# Altium PCB Elevate_sch_bak.PcbDoc
Units mm, origin at the board's own origin, x right, y up, seen from the top; angles counter-clockwise.
Board outline 70 x 70 mm, 4 copper layers (Top Layer, Internal Plane 1, Internal Plane 2, Bottom Layer), stack 0.462 mm thick; 64 components, 58 nets, 258 pads, 50 vias.
Unrouted connection lines stored in the file: 23.
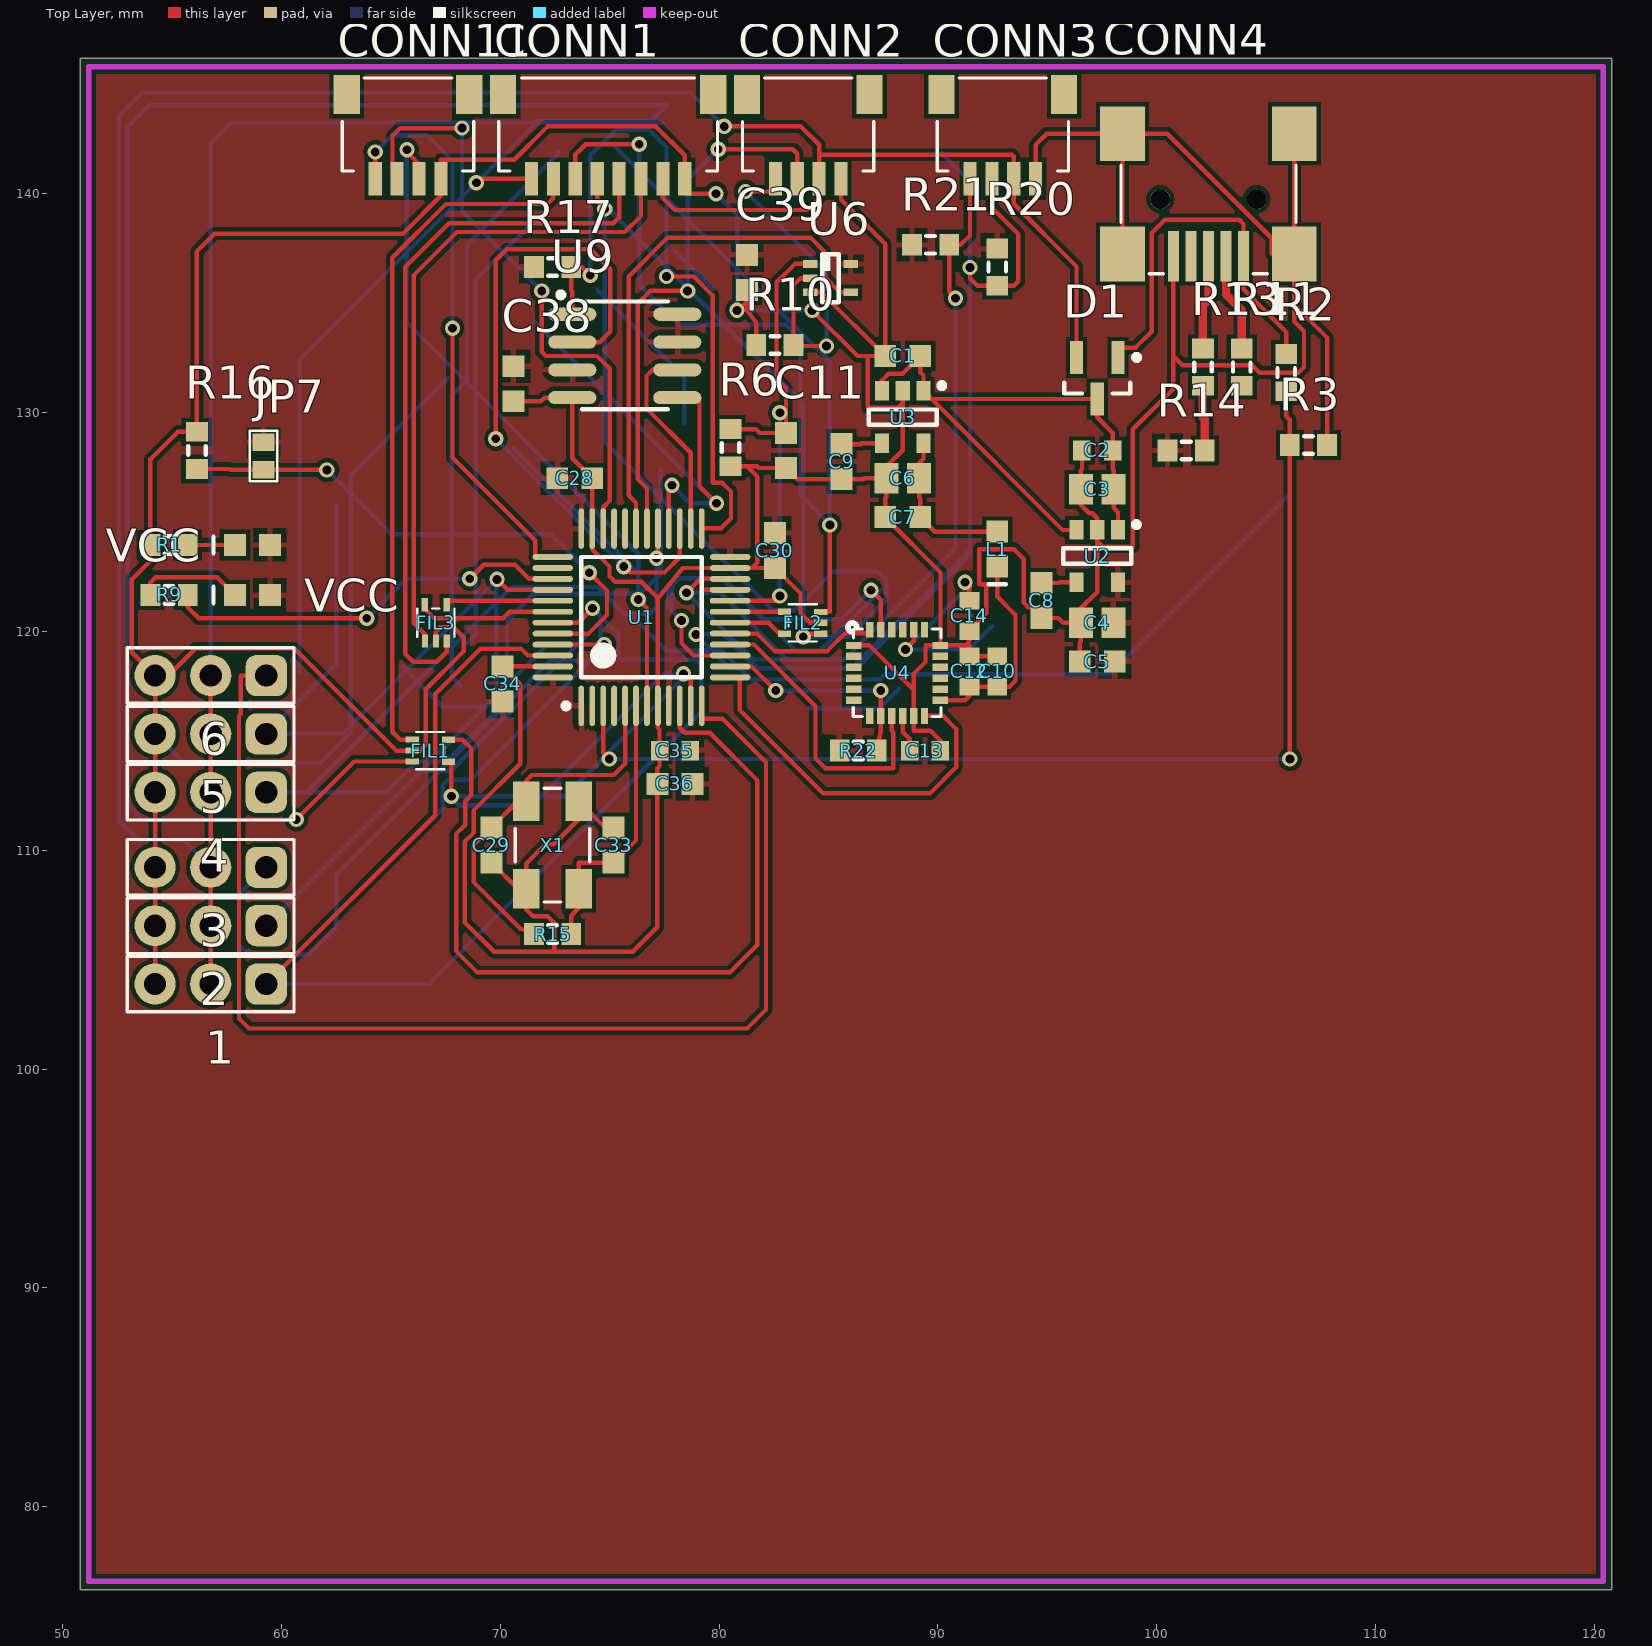
[diagram p0: Top Layer view]
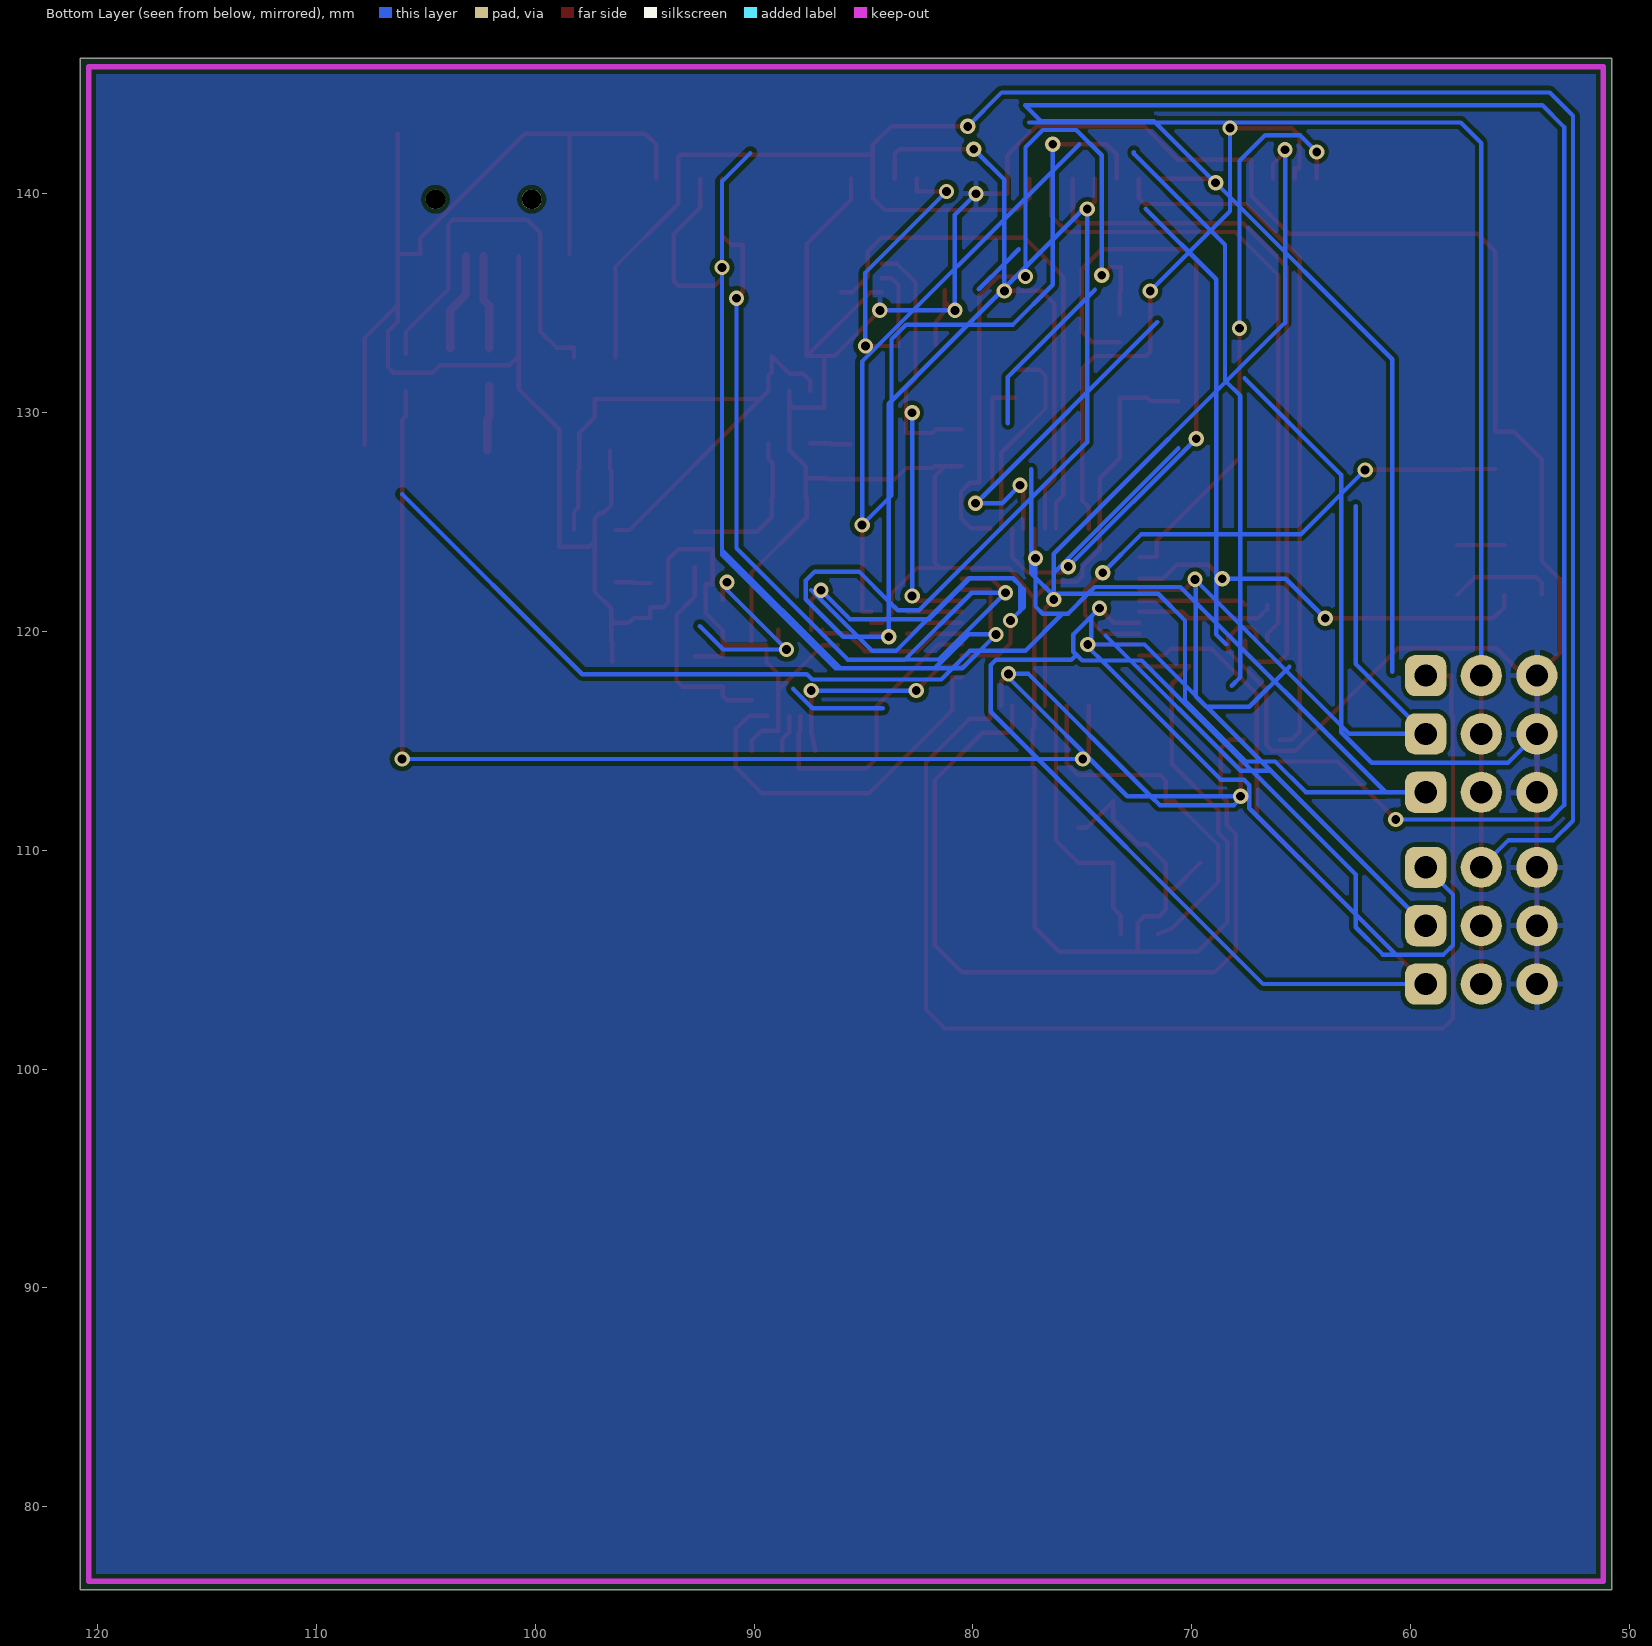
[diagram p1: Bottom Layer view, seen from below]
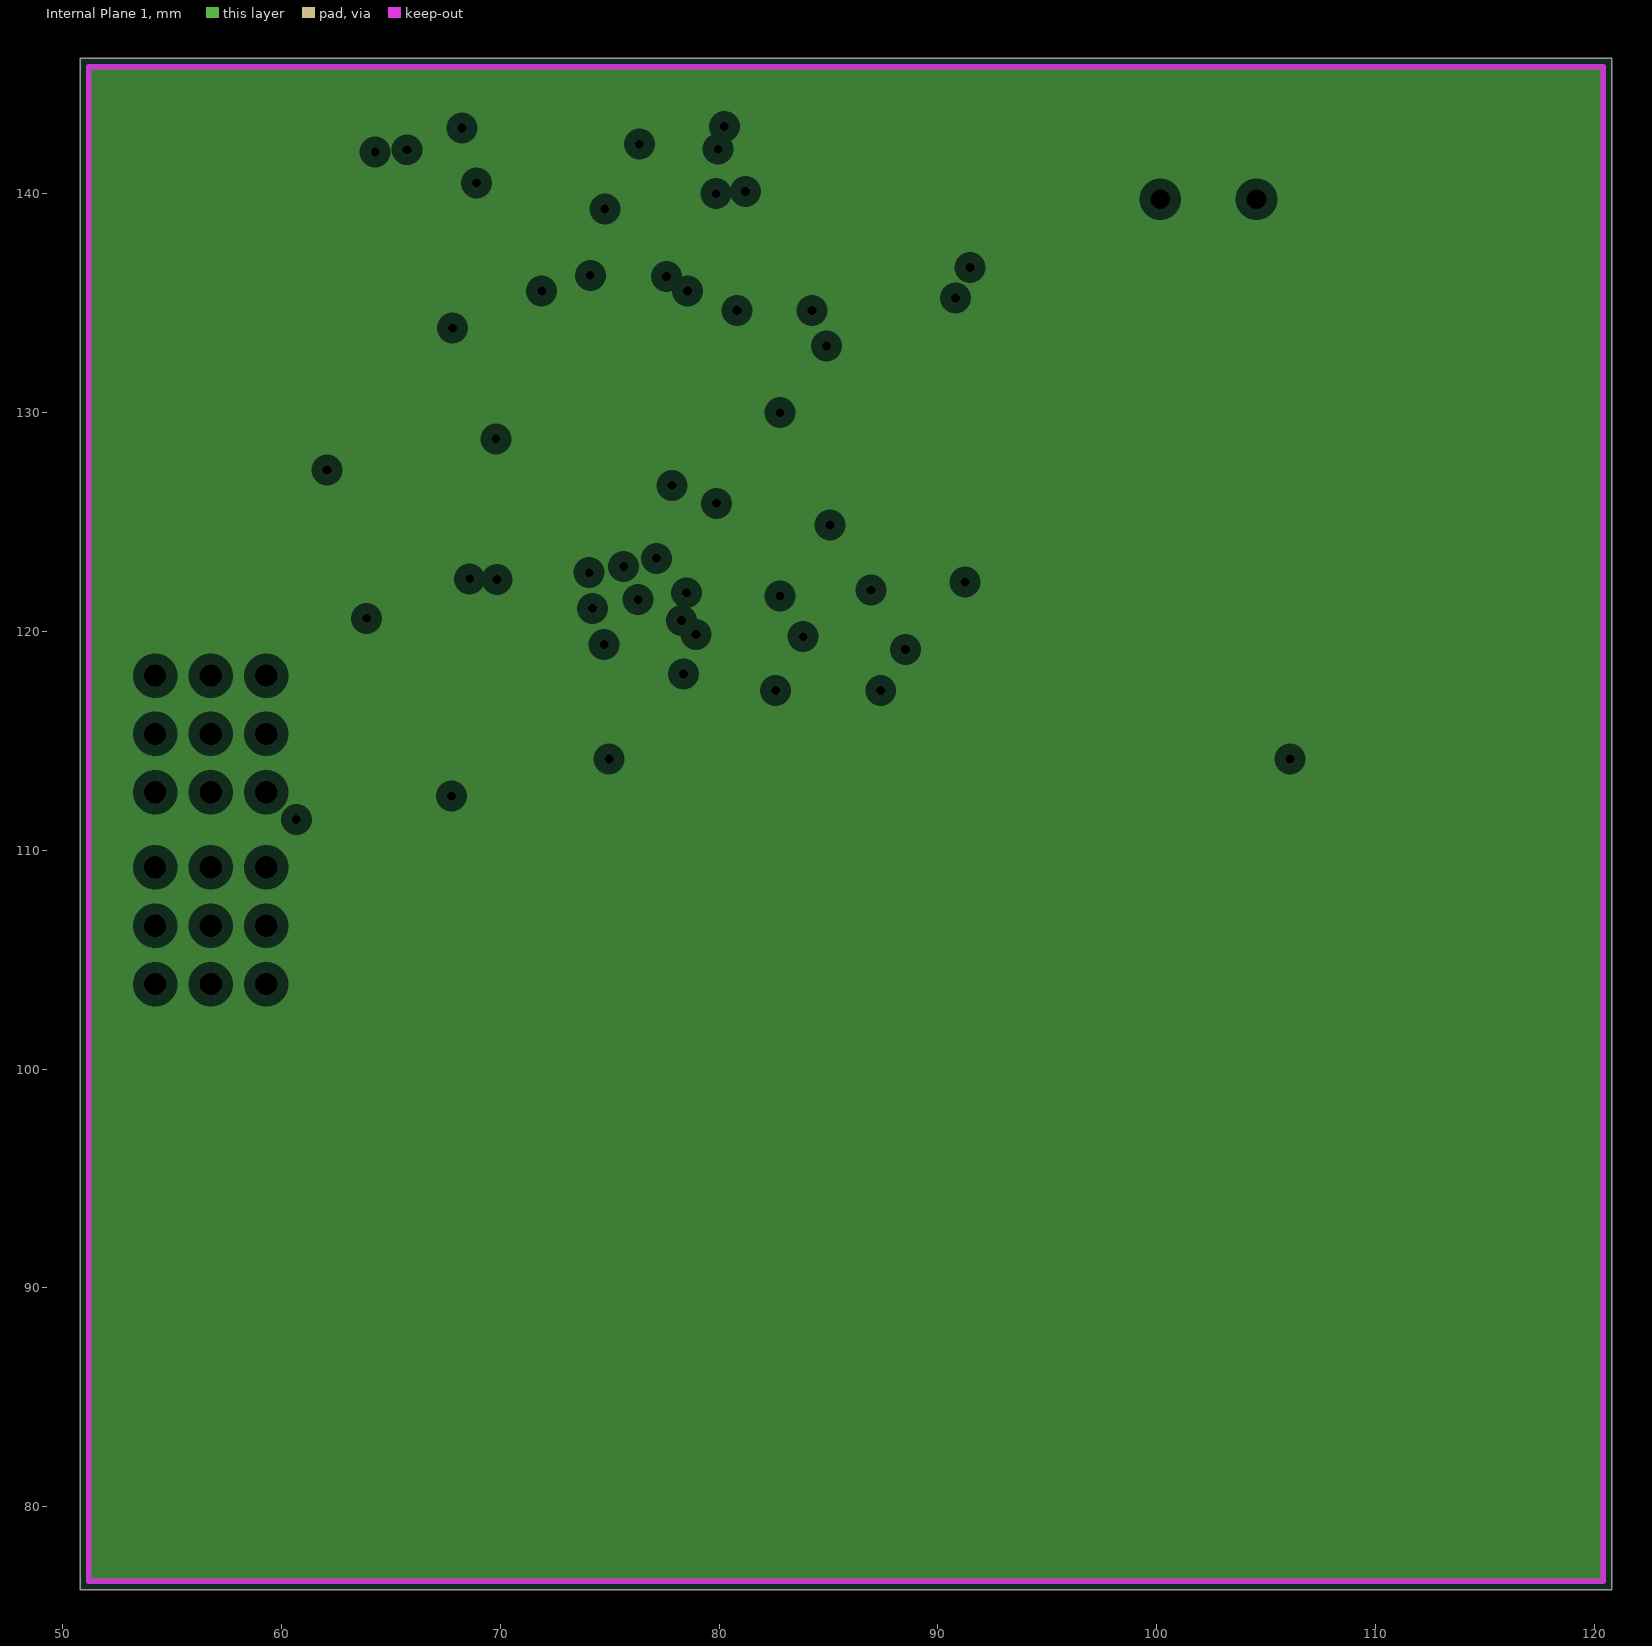
[diagram p2: Internal Plane 1, clearances drawn from the general rule]
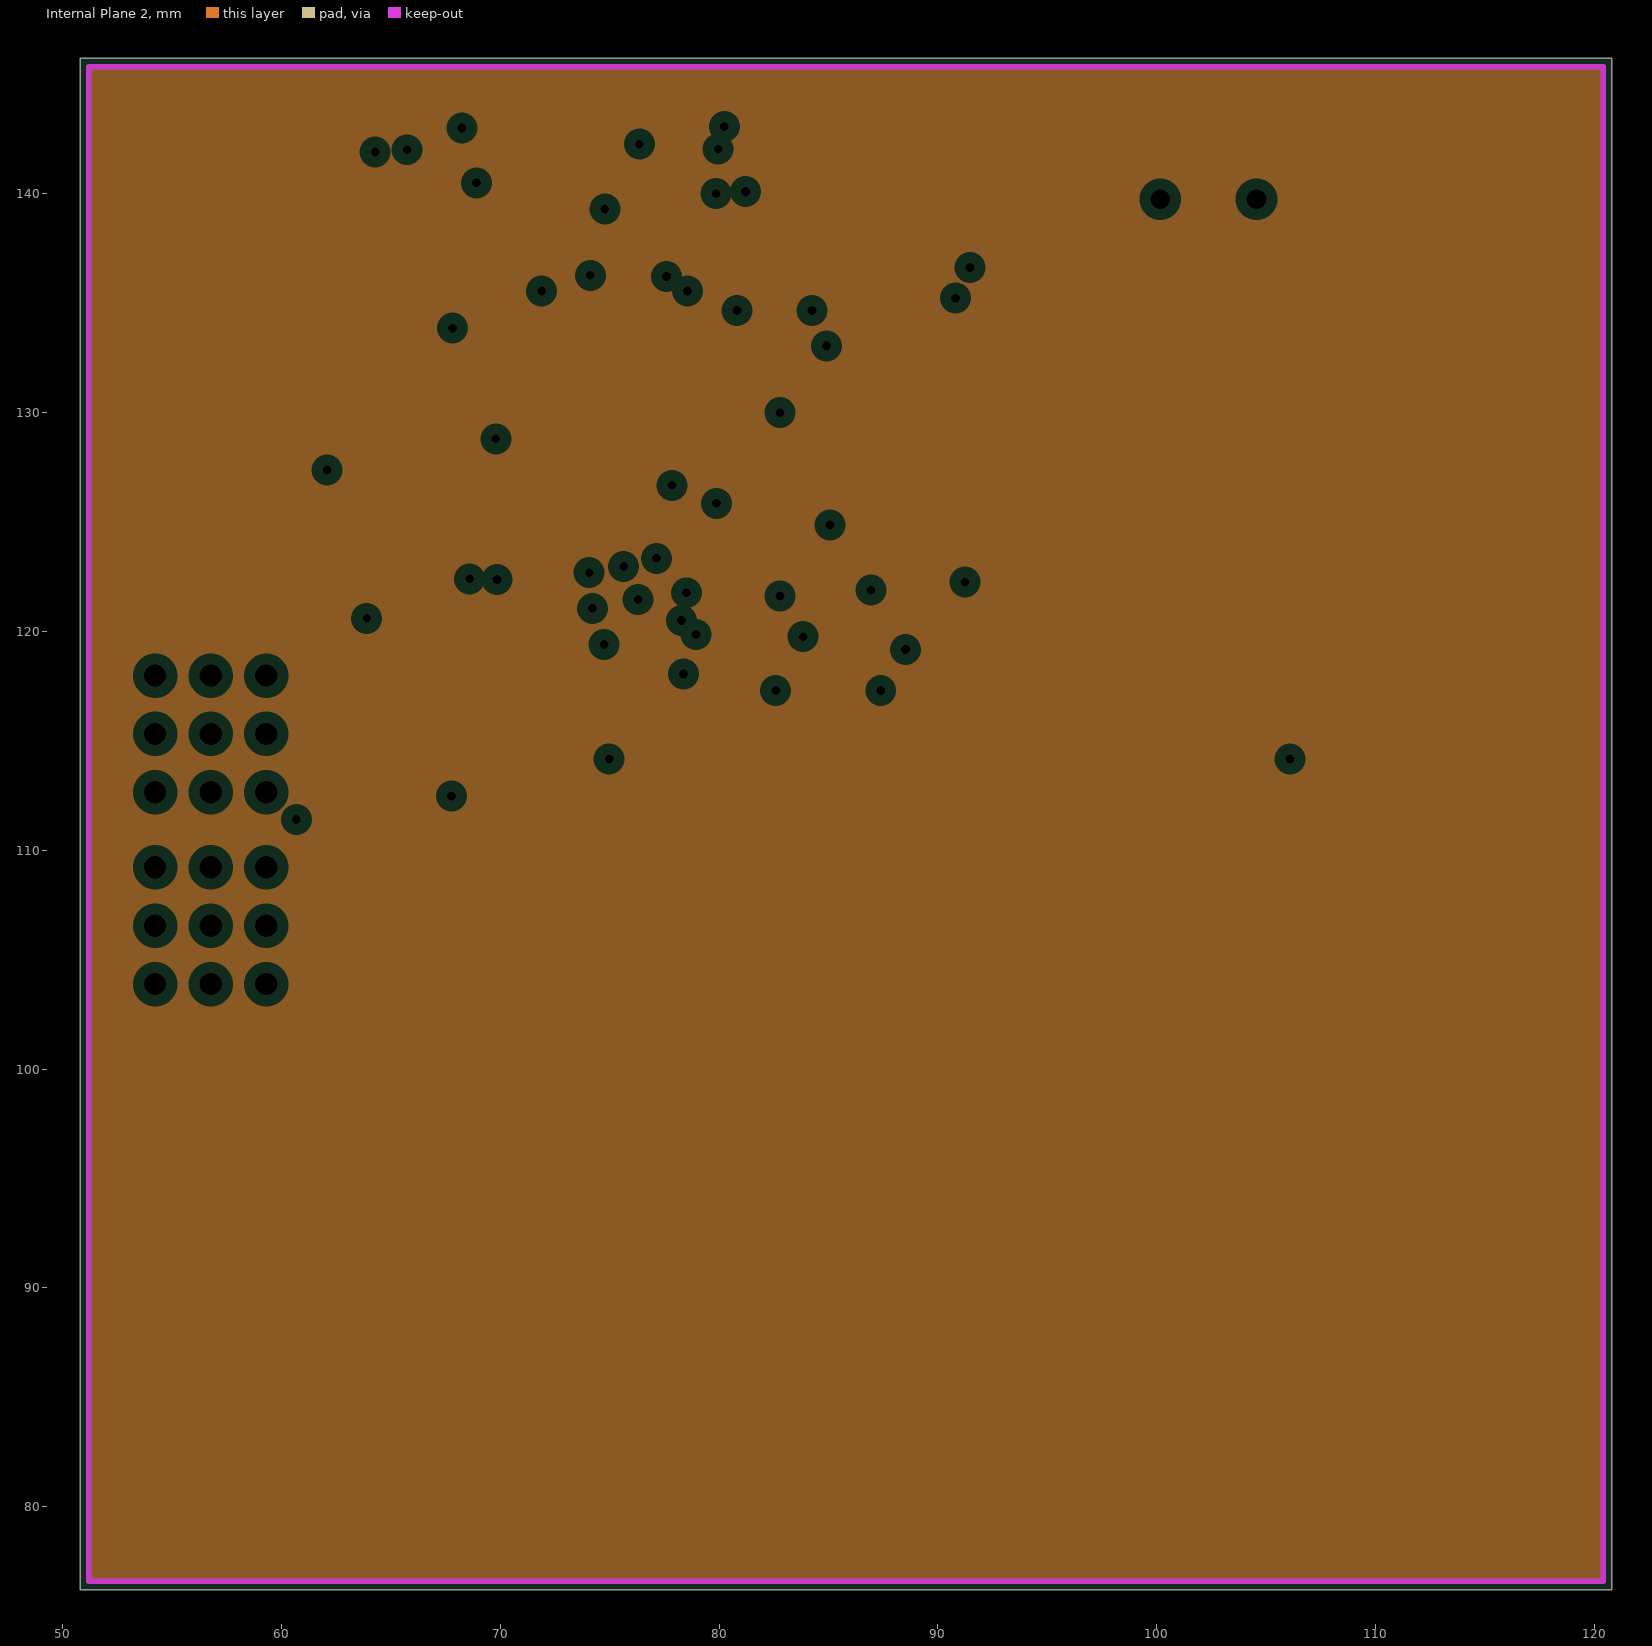
[diagram p3: Internal Plane 2, clearances drawn from the general rule]
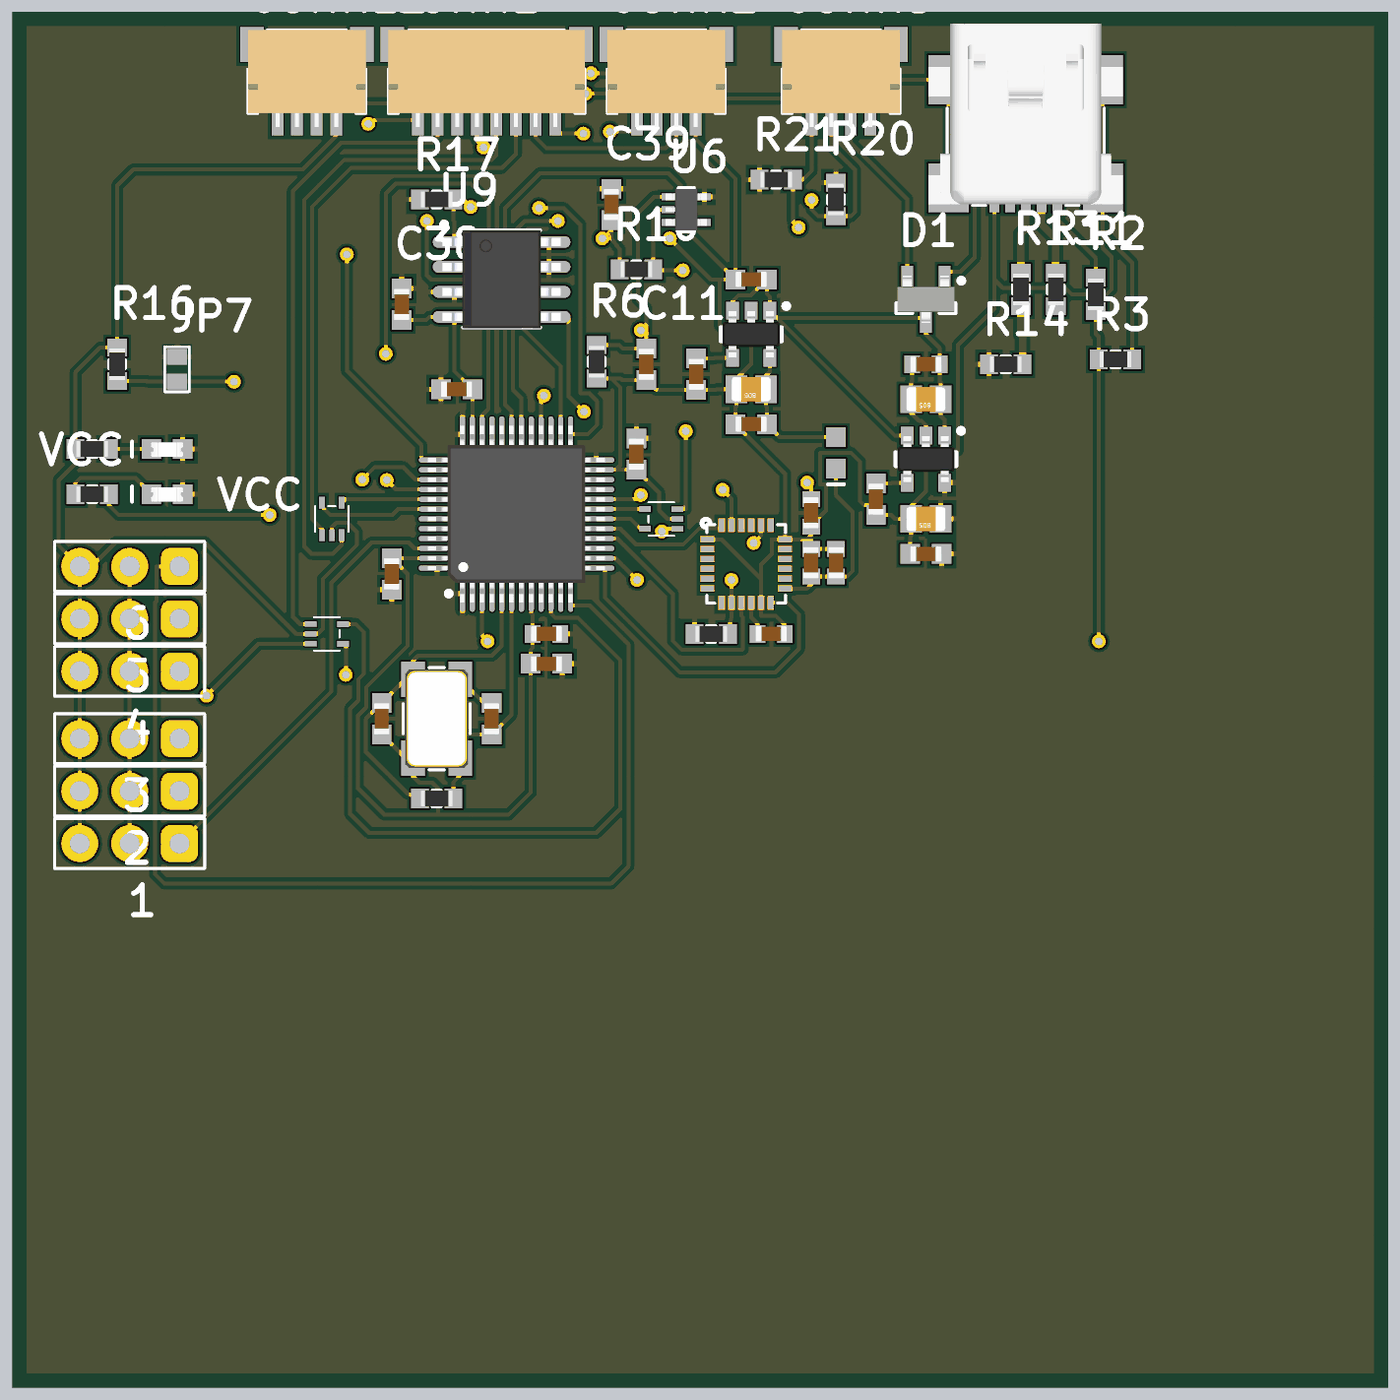
[diagram p4: 3D render of the assembled board from above, using the file's embedded part models]

## Layer stack, top to bottom
Top Solder: solder mask 0.0102, Solder Resist, Dk 3.5
Top Layer: signal copper 0.0356
Internal Plane 1: plane copper 0.0356
Internal Plane 2: plane copper 0.0356
Dielectric 1: dielectric 0.32, FR-4, Dk 4.8
Bottom Layer: signal copper 0.0356
Bottom Solder: solder mask 0.0102, Solder Resist, Dk 3.5

## Board outline
50.8,76.2 120.8,76.2 120.8,146.2 50.8,146.2

## Design rules (kind name [scope] priority, off if disabled: settings)
Clearance [All] p1: gap=0.2
DiffPairsRouting [All] p1: maxlimit=0.254 minlimit=0.254 mostfreqgap=0.254 toplayer_minwidth=0.381 toplayer_maxwidth=0.381 toplayer_prefwidth=0.381 bottomlayer_minwidth=0.381 bottomlayer_maxwidth=0.381 bottomlayer_prefwidth=0.381 maxuncoupledlength=12.7
PlaneClearance [All] p1: clearance=0.508
PlaneConnect [All] p1: planeconnectstyle=Relief reliefexpansion=0.508 reliefentries=4 reliefconductorwidth=0.254 reliefairgap=0.254
PolygonConnect [All] p1: connectstyle=Relief reliefconductorwidth=0.254 reliefentries=4 polygonreliefangle="90 Angle" airgapwidth=0.254
RoomDefinition Elevate_sch [InComponentClass('Elevate_sch')] p1: confinementstyle=ConfineIn formatcopy=TRUE lockcomponents=FALSE outline 181.991,81.28 486.244,81.28 486.244,90.551 181.991,90.551
RoutingVias [All] p1: holewidth=0.4 width=0.7 viastyle="Through Hole" minholewidth=0.711 minwidth=1.27 maxholewidth=0.711 maxwidth=1.27
SolderMaskExpansion [All] p1: expansion=0.102
UnpouredPolygon [All] p1: allowunpoured=FALSE
Width [All] p1: maxlimit=0.2 minlimit=0.2 preferedwidth=0.2
26 further rules are at their usual default settings.

## Classes and differential pairs
differential pair USB_D: +USB_D_P -USB_D_N
differential pair USB_R: +USB_R_P -USB_R_N

## Components (designator, comment, footprint, x,y, rotation, side; value= is the part's Value field where it differs from the comment)
1 "Servo out 1" "SIP3 - 0.1" 59.309,103.886 r180 top (schematic designator JP1)
2 "Servo out 2" "SIP3 - 0.1" 59.309,106.553 r180 top (schematic designator JP2)
3 "Servo out 3" "SIP3 - 0.1" 59.309,109.22 r180 top (schematic designator JP3)
4 "Servo out 4" "SIP3 - 0.1" 59.309,112.649 r180 top (schematic designator JP4)
5 "Servo out 5" "SIP3 - 0.1" 59.309,115.316 r180 top (schematic designator JP5)
6 "Servo out 6" "SIP3 - 0.1" 59.309,117.983 r180 top (schematic designator JP6)
C1 "Cap603" CAP603N 88.392,132.588 r180 top
C2 "Cap603" CAP603L 97.282,128.27 r180 top
C3 "Cap805" CAP805L 97.282,126.492 r180 top
C4 "Cap805" CAP805L 97.282,120.396 r180 top
C5 "Cap603" CAP603N 97.282,118.618 r180 top
C6 "Cap805" CAP805L 88.392,127 r180 top
C7 "Cap603" CAP603N 88.392,125.222 r180 top
C8 "Cap603" CAP603N 94.742,121.412 r270 top
C9 "Cap603" CAP603N 85.598,127.762 r270 top
C10 "Cap603" CAP603L 92.71,118.172 r90 top
C11 "Cap603" CAP603N 83.058,128.27 r270 top
C12 "Cap603" CAP603L 91.44,118.172 r90 top
C13 "Cap603" CAP603L 89.408,114.554 r0 top
C14 "Cap603" CAP603L 91.44,120.712 r90 top
C28 "Cap603" CAP603N 73.406,127 r180 top
C29 "Cap603" CAP603N 69.596,110.236 r90 top
C30 "Cap603" CAP603N 82.55,123.698 r90 top
C33 "Cap603" CAP603N 75.184,110.236 r270 top
C34 "Cap603" CAP603N 70.104,117.602 r270 top
C35 "Cap603" CAP603L 77.978,114.554 r180 top
C36 "Cap603" CAP603N 77.978,113.03 r0 top
C38 "Cap603" CAP603N 70.612,131.318 r270 top
C39 "Cap603" CAP603N 81.28,136.398 r270 top
CONN1 "RC Input" "JST SH 8 Pin Side Entry" 74.93,145.288 r180 top
CONN2 "USART 1" "JST SH 4 Pin Side Entry" 84.074,145.288 r180 top
CONN3 "Flexi Port" "JST SH 4 Pin Side Entry" 92.964,145.288 r180 top
CONN4 "USB" "USB SMD" 102.362,142.748 r180 top
CONN11 "SWD" "JST SH 4 Pin Side Entry" 65.786,145.288 r180 top
D1 "BAT54C" SOT23-3N 97.282,131.572 r270 top
FIL1 "IP4256CZ5-W,115" SOT-665 66.802,114.554 r0 top
FIL2 "IP4256CZ5-W,115" SOT-665 83.82,120.396 r180 top
FIL3 "IP4256CZ5-W,115" SOT-665 67.056,120.396 r90 top
JP7 "2 PAD Touch JMP" "TOUCH JMP 2PAD" 59.182,128.016 r180 top
L1 "FB 300mA" IND603N 92.71,123.76 r90 top
R1 "Res603" RES603N 54.864,123.952 r0 top
R2 "Res603" RES603N 105.918,131.826 r270 top
R3 "Res603" RES603N 106.934,128.524 r180 top
R6 "Res603" RES603N 80.518,128.397 r90 top
R9 "Res603" RES603N 54.864,121.666 r0 top
R10 "Res603" RES603N 82.55,133.096 r0 top
R11 "Res603" RES603N 103.886,132.08 r90 top
R13 "Res603" RES603N 102.108,132.08 r90 top
R14 "Res603" RES603N 101.346,128.27 r0 top
R15 "Res603" RES603N 72.39,106.172 r180 top
R16 "Res603" RES603N 56.134,128.27 r270 top
R17 "Res603" RES603N 72.39,136.652 r0 top
R20 "Res603" RES603N 92.71,136.652 r90 top
R21 "Res603" RES603N 89.662,137.668 r180 top
R22 "Res603" RES603N 86.36,114.554 r180 top
U1 "STM32F103CBT6" "STM32 48 Lead" 76.454,120.65 r90 top
U2 "LP2992-3.3" SOT23-5L 97.282,123.444 r270 top
U3 "LP2992-3.3" SOT23-5L 88.392,129.794 r270 top
U4 "MPU-6000" IMU-3000 88.138,118.11 r0 top
U6 "XOR" DCK-5 85.09,136.144 r0 top
U9 "Flash 16Mbits" SOIC8_N 75.692,132.588 r0 top
VCC "Green" LED603N 58.674,123.952 r0 top (schematic designator D2)
VCC "Blue" LED603N 58.674,121.666 r0 top (schematic designator D5)
X1 "8MHz" "XTAL ACT530SMX-4 Series" 72.39,110.236 r90 top

## Footprints (in the part's own frame and the unit in brackets; to place one, negate y for a bottom-side part, rotate by r counter-clockwise, add the part's x,y. Pads: shape width x height; smd on the part's side, far side on the other; paste and mask are expansions set on the pad)
CAP603L [mm]
  rect 0.8x0.9 smd: 1(-0.7,0) 2(0.7,0)
  body extent -0.8,-0.4 0.8,0.4, height 0.77
CAP603N [mm]
  rect 1x1 smd: 1(-0.8,0) 2(0.8,0)
  body extent -0.8,-0.4 0.8,0.4, height 0.77
CAP805L [mm]
  rect 1.1x1.4 smd: 1(-0.75,0) 2(0.75,0)
  body extent -1,-0.62 1,0.63, height 0.78
DCK-5 [mm]
  rect 0.65x0.35 smd mask+0.076: 1(-0.925,0.65) 2(-0.925,0) 3(-0.925,-0.65) 4(0.925,-0.65) 5(0.925,0.65)
  silkscreen extent -0.45,-1.1 0.38,1.1, body extent -1.05,-1.05 1.05,1.05, height 1
IMU-3000 [mm]
  rect 0.711x0.337 smd paste-0.03 mask+0.04: 1(-1.975,1.25) 2(-1.975,0.75) 3(-1.975,0.25) 4(-1.975,-0.25) 5(-1.975,-0.75) 6(-1.975,-1.25) 13(1.975,-1.25) 14(1.975,-0.75) 15(1.975,-0.25) 16(1.975,0.25) 17(1.975,0.75) 18(1.975,1.25)
  rect 0.337x0.711 smd paste-0.03 mask+0.04: 7(-1.25,-1.975) 8(-0.75,-1.975) 9(-0.25,-1.975) 10(0.25,-1.975) 11(0.75,-1.975) 12(1.25,-1.975) 19(1.25,1.975) 20(0.75,1.975) 21(0.25,1.975) 22(-0.25,1.975) 23(-0.75,1.975) 24(-1.25,1.975)
  silkscreen extent -2.25,-2 2,2.27, body extent -2,-2 2,2, height 0.95
IND603N [mm]
  rect 1x1 smd: 1(-0.8,0) 2(0.8,0)
  silkscreen extent -1.6,-0.4 -1.6,0.4, body extent -0.87,-0.48 0.87,0.48, height 0.71
"JST SH 4 Pin Side Entry" [mm]
  rect 1.2x1.8 smd paste+0 mask+0.051: 0(-2.8,0.75) 0(2.8,0.75)
  rect 0.6x1.55 smd paste+0 mask+0.051: 1(-1.5,4.6) 2(-0.5,4.6) 3(0.5,4.6) 4(1.5,4.6)
  silkscreen extent -3,0 3,4.25, body extent -3,0 3,4.95, height 2.92
"JST SH 8 Pin Side Entry" [mm]
  rect 1.2x1.8 smd paste+0 mask+0.051: 0(-4.8,0.75) 0(4.8,0.75)
  rect 0.6x1.55 smd paste+0 mask+0.051: 1(-3.5,4.6) 2(-2.5,4.6) 3(-1.5,4.6) 4(-0.5,4.6) 5(0.5,4.6) 6(1.5,4.6) 7(2.5,4.6) 8(3.5,4.6)
  silkscreen extent -5,0 5,4.25, body extent -5,0 5,4.95, height 2.92
LED603N [mm]
  rect 1x1 smd: 1(-0.8,0) 2(0.8,0)
  silkscreen extent -1.78,-0.38 -1.78,0.38, body extent -0.82,-0.38 0.82,0.34, height 0.68
RES603N [mm]
  rect 0.9x1 smd: 1(-0.85,0) 2(0.85,0)
  silkscreen extent -0.2,-0.4 0.2,0.4, body extent -0.8,-0.4 0.8,0.4, height 0.44
"SIP3 - 0.1" [mil]
  rrect50% 74x74 hole 40: 1(0,0)
  round 74 hole 40: 2(100,0) 3(200,0)
  silkscreen extent -50,-50 250,50, body extent -47,-47 248,47, height 394
SOIC8_N [mm]
  oval 2.2x0.6 smd: 1(-2.4,1.905) 2(-2.4,0.635) 3(-2.4,-0.635) 4(-2.4,-1.905) 5(2.4,-1.905) 6(2.4,-0.635) 7(2.4,0.635) 8(2.4,1.905)
  silkscreen extent -3.05,-2.44 1.96,2.92, body extent -3.01,-2.5 3.01,2.5, height 1.75
SOT23-3N [mm]
  rect 1.5x0.6 smd: 1(-0.95,0.95) 2(-0.95,-0.95) 3(0.95,0)
  silkscreen extent -1.07,-1.5 0.7,1.93, body extent -1.21,-1.45 1.21,1.45, height 0.99
SOT23-5L [mm]
  rect 0.9x0.65 smd mask+0.076: 1(-1.2,0.95) 2(-1.2,0) 3(-1.2,-0.95) 4(1.2,-0.95) 5(1.2,0.95)
  silkscreen extent -1.56,-1.55 0.35,1.91, body extent -1.17,-1.46 1.17,1.46, height 0.97
SOT-665 [mm]
  rect 0.6x0.28 smd mask+0.076: 1(-0.825,0.5) 2(-0.825,0) 3(-0.825,-0.5)
  rect 0.6x0.3 smd mask+0.076: 4(0.825,-0.5) 5(0.825,0.5)
  silkscreen extent -0.65,-0.85 0.65,0.85, body extent -0.65,-0.85 0.65,0.85, height 0.6
"STM32 48 Lead" [mm]
  oval 1.85x0.265 smd mask+0.076: 1(-4.05,2.75) 2(-4.05,2.25) 3(-4.05,1.75) 4(-4.05,1.25) 5(-4.05,0.75) 6(-4.05,0.25) 7(-4.05,-0.25) 8(-4.05,-0.75) 9(-4.05,-1.25) 10(-4.05,-1.75) 11(-4.05,-2.25) 12(-4.05,-2.75) 25(4.05,-2.75) 26(4.05,-2.25) 27(4.05,-1.75) 28(4.05,-1.25) 29(4.05,-0.75) 30(4.05,-0.25) 31(4.05,0.25) 32(4.05,0.75) 33(4.05,1.25) 34(4.05,1.75) 35(4.05,2.25) 36(4.05,2.75)
  oval 0.265x1.85 smd mask+0.076: 13(-2.75,-4.05) 14(-2.25,-4.05) 15(-1.75,-4.05) 16(-1.25,-4.05) 17(-0.75,-4.05) 18(-0.25,-4.05) 19(0.25,-4.05) 20(0.75,-4.05) 21(1.25,-4.05) 22(1.75,-4.05) 23(2.25,-4.05) 24(2.75,-4.05) 37(2.75,4.05) 38(2.25,4.05) 39(1.75,4.05) 40(1.25,4.05) 41(0.75,4.05) 42(0.25,4.05) 43(-0.25,4.05) 44(-0.75,4.05) 45(-1.25,4.05) 46(-1.75,4.05) 47(-2.25,4.05) 48(-2.75,4.05)
  silkscreen extent -4.17,-2.75 2.75,3.57, body extent -4.5,-4.49 4.5,4.51, height 1.56
"TOUCH JMP 2PAD" [mm]
  rect 1.016x0.8 smd mask+0: 1(0,0.635) 2(0,-0.635)
  silkscreen extent -0.63,-1.15 0.62,1.15
"USB SMD" [mm]
  rect 2.05x2.5 smd: 0(-3.925,5.5) 0(-3.925,0) 0(3.925,5.5) 0(3.925,0)
  rect 0.5x2.3 smd mask+0.085: 1(-1.6,5.6) 2(-0.8,5.6) 3(0,5.6) 4(0.8,5.6) 5(1.6,5.6)
  round 0.9 hole 0.9 unplated: 6(-2.2,3) 6(2.2,3)
  silkscreen extent -4,1.45 4,6.4, body extent -4.95,-2.85 4.95,6.35, height 4.17
"XTAL ACT530SMX-4 Series" [mm]
  rect 1.8x1.2 smd: 1(-2,-1.2) 2(2,-1.2) 3(2,1.2) 4(-2,1.2)
  silkscreen extent -2.6,-1.7 2.6,1.7, body extent -2.5,-1.6 2.5,1.6, height 1

## Part data
1 2 3 4 5 6: library part "Hdr 3 Pin 0.1", "Header, 3-Pin, 0.1\""
C1 C2 C3 C4 C5 C6 C7 C8 C9 C10 C11 C12 C13 C14 C28 C29 C30 C33 C34 C35 C36 C38 C39: "Capacitor SMD"
CONN1: library part "JST-SH 8-pin Side Entry Socket", "JST-SH 8-pin Side Entry Socket"
CONN2 CONN3 CONN11: library part "JST-SH 4-pin Side Entry Socket", "JST-SH 4-pin Side Entry Socket"
CONN4: library part USB_SMT_B, "USB Type-B SMT Socket"
D1: "Dual Diode Command Cathode"
FIL1 FIL2 FIL3: library part "RF Filter 100R 30pF", "IP4256CZ5-W,115 2 channel, 100R, 30pF, RF ESD Filter"
JP7: "2 Pad Touch Jumper"
L1: library part FerriteBead_300mA, "Ferrite Bead 300mA"
R1 R2 R3 R6 R9 R10 R11 R13 R14 R15 R16 R17 R20 R21 R22: "Resistor SMD"
U1: "STM32 ARM-based 32-bit MCU with 128 Kbytes Flash, 48-pin LQFP, Industrial Temperature"
U2 U3: library part LP2985-3.3, "3.3V 250mA LDO Regulator"
U4: library part MPU-3/6000, "Invensense MPU-3/6000,  3-axis Gyros & Accel on 6000"
U6: library part "XOR SN74LVC1G86DCKR", "XOR Gate SN74LVC1G86DCKR"
U9: library part "Flash 16Mb 75MHZ 8SOIC", "16Mbit SPI Flash Memory"
VCC: library part "LED 603 Gr", "Green 603 LED"
VCC: library part "LED 603 Bl", "Blue 603 LED"
X1: library part "XTAL ACT530SMX-4", "Surface Mount Quartz Crystal, Digikey 535-9720-1-ND"

## Via types
v1: diameter 0.7, hole 0.4, Top Layer to Bottom Layer, 50 vias

## Nets (pads, with @x,y where several pads share a name; then routed paths per layer and width w, separated by ;. In a path a pad name is that pad's centre, name@x,y a point inside that pad or via, vN(x,y) a via of type N, cw(c..) or ccw(c..) an arc to the next point about the centre after c; other vN are vias at no path point)
BOOT: JP7.1 R16.2 U1.44 | length 25
  Top Layer w0.2: R16.2 57.633,127.42 57.672,127.381 JP7.1 v1(62.078,127.381) ; U1.44 74.029,119.9 74.879,120.75 74.879,121.869 v1(74.066,122.682)
  Bottom Layer w0.2: v1(62.078,127.381) 65.024,124.435 72.314,124.435 v1(74.066,122.682)
CS_FLSH: R17.2 U1.25 U9.1 | length 45
  Top Layer w0.2: U9.1 73.292,135.534 73.24,135.586 R17.2 73.736,136.652 v1(74.117,136.271) ; v1(77.597,136.22) 78.842,136.22 79.705,135.357 79.705,126.797 80.137,126.797 80.543,126.39 80.543,125.171 80.086,124.714 79.204,124.714 U1.25
  Bottom Layer w0.2: 71.577,134.137 79.578,126.136 ; v1(74.117,136.271) 74.117,141.757 75.275,142.915 76.81,142.915 77.597,142.128 v1(77.597,136.22)
GND: 1.3 2.3 3.3 4.3 5.3 6.3 C1.2 C2.2 C3.2 C4.2 C5.2 C6.2 C7.2 C8.2 C9.2 C10.2 C11.2 C12.2 C13.2 C14.1 C28.1 C29.1 C30.1 C33.1 C34.1 C35.2 C36.1 C38.2 C39.2 CONN1.1 CONN2.1 CONN3.1 CONN4.0 CONN4.5 CONN11.1 FIL1.2 FIL2.2 FIL3.2 R1.1 R3.1 R6.1 R10.1 R16.1 U1.8 U1.23 U1.35 U1.47 U2.2 U3.2 U4.1 U4.11 U4.18 U6.3 U9.4 X1.2 X1.4 | length 351
  Top Layer w0.2: 1.3 2.3 3.3 4.3 5.3 54.229,116.637 6.3@54.229,117.373 ; FIL3.2 67.056,119.99 67.259,120.193 67.869,120.193 68.326,119.736 68.326,119.082 66.599,117.354 66.599,114.808 66.345,114.554 FIL1.2 65.253,114.554 60.579,119.228 56.083,119.228 6.3@54.229,117.373 ; C29.1 70.796,108.236 X1.4 ; C38.2 71.857,130.518 72.022,130.683 U9.4 73.292,127.914 C28.1 74.206,126.327 74.204,126.325 U1.35 74.204,123.749 74.991,122.962 74.991,122.53 75.245,122.276 76.442,122.276 77.204,121.514 ; U1.47 71.416,118.4 71.414,118.402 C34.1 70.917,117.589 70.917,113.957 68.796,111.836 68.796,110.808 68.383,110.395 68.383,106.699 69.723,105.359 72.466,105.359 ; C33.1 74.79,111.036 X1.2 73.59,111.417 72.446,110.272 72.07,110.272 71.19,109.392 X1.4 ; v1(79.858,140.005) 78.43,140.005 CONN1.1 78.43,141.757 77.109,143.078 72.161,143.078 70.639,141.556 67.286,141.556 CONN11.1 67.286,139.905 65.557,138.176 56.947,138.176 56.134,137.363 R16.1 55.27,129.12 54.014,127.864 R1.1 54.014,123.229 53.162,122.377 53.162,119.05 6.3 6.3@54.229,117.373 ; R6.1 81.28,127.547 ; v1(80.823,134.671) 80.874,134.671 81.28,135.077 ; C39.2 81.28,135.077 ; R10.1 81.7,134.112 81.28,134.671 81.28,135.077 ; U6.3 84.686,135.494 C1.2 ; v1(84.252,134.671) 86.335,132.588 86.792,132.588 ; FIL2.2 84.15,120.396 83.718,120.828 83.718,121.73 C30.1 81.511,122.898 81.509,122.9 81.498,122.9 ; CONN2.1 85.574,139.725 87.592,137.707 C1.2 ; U4.1 86.868,119.36 88.888,117.34 ; U3.2 88.392,130.429 ; C13.2 90.108,115.011 89.651,115.468 88.888,115.468 U4.11 88.888,117.34 ; C10.2 C12.2 91.44,119.36 91.237,119.36 ; CONN3.1 94.464,142.24 94.972,142.748 CONN4.0@98.437,142.748 ; C5.2 96.482,119.482 96.532,119.532 C4.2 ; C2.2 96.582,127.406 96.532,127.356 C3.2 96.532,125.781 96.913,125.4 97.053,125.4 97.282,125.171 U2.2 97.282,124.13 ; CONN4.0@98.437,137.248 CONN4.0@98.437,142.748 ; CONN4.5 100.762,132.588 ; CONN4.0@106.287,142.748 CONN4.0@106.287,137.248 ; R3.1 107.784,133.426 106.287,134.923 ; X1.4 71.19,107.29 71.495,106.985 72.161,106.985 72.466,106.68 72.466,105.359 ; 72.466,105.359 76.06,105.359 77.178,106.477 C36.1 77.178,113.741 77.278,113.841 C35.2 77.278,115.519 77.204,115.593 U1.8 77.204,121.514 ; 77.204,121.514 78.348,122.9 U1.23 81.498,122.9 ; 81.28,127.547 81.737,127.09 81.737,123.139 81.498,122.9 ; 81.28,127.547 81.737,127.547 81.814,127.47 C11.2 83.566,126.962 C9.2 86.589,126.962 86.627,127 C6.2 ; 86.792,132.588 86.792,130.226 88.189,130.226 88.392,130.429 ; 86.792,132.588 C1.2 ; C6.2 87.642,126.136 87.592,126.086 C7.2 90.119,122.695 U4.18@90.119,119.36 ; C6.2 87.642,127.533 88.392,128.283 88.392,130.429 ; 88.888,117.34 88.888,118.059 89.433,118.605 89.433,119.36 U4.18 U4.18@90.119,119.36 ; U4.18@90.119,119.36 91.237,119.36 ; 91.237,119.36 91.44,119.563 C14.1 91.44,120.066 92.202,120.828 92.202,122.149 91.897,122.149 91.897,123.76 93.472,123.76 93.929,123.303 93.929,121.31 94.132,121.107 94.742,121.107 C8.2 95.504,120.612 95.72,120.396 C4.2 ; C4.2 96.532,121.056 97.282,121.806 97.282,124.13 ; 97.282,124.13 97.536,123.876 98.908,123.876 98.908,129.235 100.762,131.09 100.762,132.588 ; CONN4.0@98.437,142.748 100.482,142.748 105.258,137.973 105.258,137.248 CONN4.0@106.287,137.248 ; 100.762,132.588 101.194,132.156 104.369,132.156 104.699,131.826 106.477,131.826 106.731,132.08 106.731,133.719 106.287,134.163 106.287,134.923 ; 106.287,134.923 CONN4.0@106.287,137.248
  Bottom Layer w0.2: 5.3 55.55,113.995 61.773,113.995 63.17,115.392 63.17,127.152 67.589,131.572 ; v1(79.858,140.005) 80.823,139.04 v1(80.823,134.671) v1(84.252,134.671)
GYRO_CS#: R22.1 U1.14 U4.8 | length 14.6
  Top Layer w0.2: U1.14 81.483,118.4 v1(82.586,117.297) ; R22.1 87.388,115.418 U4.8 v1(87.388,117.297)
  Bottom Layer w0.2: v1(82.586,117.297) v1(87.388,117.297) ; 84.118,116.484 87.325,116.484 88.214,117.373
GYRO_INT#: U1.13 U4.12 | length 17.4
  Top Layer w0.2: U1.13 80.95,117.9 80.95,116.408 84.76,112.598 89.637,112.598 90.83,113.792 90.83,115.545 90.221,116.154 89.388,116.154 U4.12
GYRO_VDD: C10.1 C12.1 L1.1 U4.13 | length 9.6
  Top Layer w0.2: U4.13 91.237,116.86 91.44,117.063 C12.1 C10.1 93.269,117.472 93.548,117.751 93.548,120.756 92.71,121.594 L1.1
INV: C11.1 R6.2 U1.20 U6.1 | length 23
  Top Layer w0.2: U1.20 82.563,121.4 v1(82.779,121.615) ; R6.2 81.686,129.247 81.863,129.07 C11.1 83.058,129.718 ; v1(82.779,129.997) 83.058,129.718 ; U6.1 83.467,136.794 82.626,135.954 82.626,131.547 83.058,131.115 83.058,129.718
  Bottom Layer w0.2: v1@82.601,129.997 v1@82.779,129.819 ; v1(82.779,121.615) v1@82.779,129.819 ; v1(82.779,129.997) v1@82.779,129.819
LED_BLUE: R9.2 U1.39 | length 29.4
  Top Layer w0.2: R9.2 55.714,121.107 56.222,120.599 v1(63.896,120.599) ; v1(68.605,122.403) 69.247,123.044 70.676,123.044 71.32,122.4 U1.39
  Bottom Layer w0.2: v1(63.896,120.599) 65.699,122.403 v1(68.605,122.403) ; 65.532,118.389 67.367,116.554 69.336,116.554 69.825,117.043 69.825,122.4
MISO: U1.16 U4.9 | length 13.6
  Top Layer w0.2: U1.16 81.59,119.4 84.404,116.586 84.404,114.198 84.849,113.754 87.96,113.754 87.96,115.396 87.888,115.468 U4.9
MOSI: U1.17 U4.24 | length 7.2
  Top Layer w0.2: U1.17 81.737,119.9 82.537,119.101 84.938,119.101 85.761,119.924 86.888,119.924 U4.24
NetC8_1: C8.1 U2.4 | length 1.6
  Top Layer w0.2: C8.1 95.504,122.212 95.536,122.244 U2.4
NetC9_1: C9.1 U3.4 | length 1.9
  Top Layer w0.2: C9.1 86.487,128.562 86.519,128.594 U3.4
NetC13_1: C13.1 U4.10 | length 1.7
  Top Layer w0.2: U4.10 88.388,115.399 88.708,115.079 C13.1
NetC14_2: C14.2 U4.20 | length 10.6
  Top Layer w0.2: v1(88.519,119.177) 88.888,119.546 U4.20 ; v1(91.237,122.25) 91.44,122.047 C14.2
  Bottom Layer w0.2: v1(91.237,122.25) 91.237,121.895 v1(88.519,119.177) 91.415,119.177 92.481,120.244
NetCONN1_3: CONN1.3 FIL3.1 | length 30.1
  Top Layer w0.2: FIL3.1 66.556,119.872 66.053,120.375 66.053,136.284 68.021,138.252 75.693,138.252 76.43,138.989 CONN1.3
NetCONN1_4: CONN1.4 FIL3.3 | length 54.3
  Top Layer w0.2: FIL3.3 67.556,119.075 67.099,118.618 66.02,118.618 65.653,118.985 65.653,136.641 67.664,138.652 75.169,138.652 75.43,138.913 CONN1.4
  Bottom Layer w0.2: 68.428,119.405 68.881,119.859 68.881,136.09 72.111,139.319
NetCONN1_5: CONN1.5 FIL2.1 | length 58.8
  Top Layer w0.2: CONN1.5 74.43,139.649 v1(74.778,139.302) ; v1(83.845,119.761) 83.98,119.896 FIL2.1
  Bottom Layer w0.2: v1(74.778,139.302) 74.778,128.651 82.463,120.965 83.439,120.965 83.845,121.372 ; v1@74.778,139.471 83.845,130.404 83.845,121.372 ; 83.845,121.372 85.207,122.733 87.23,122.733 87.636,122.326 87.636,121.469 85.928,119.761 v1(83.845,119.761) 83.845,121.372
NetCONN1_6: CONN1.6 FIL2.3 | length 54
  Top Layer w0.2: CONN1.6 73.43,141.783 73.913,142.265 v1(76.352,142.265) ; FIL2.3 85.065,120.896 v1(85.065,124.866)
  Bottom Layer w0.2: 75.133,142.265 76.352,141.046 ; v1(76.352,142.265) 76.352,141.046 ; 76.352,141.046 76.352,135.839 78.171,134.021 83.048,134.021 83.718,133.35 83.718,126.213 v1(85.065,124.866) 85.065,132.334 76.352,141.046
NetCONN1_7: CONN1.7 FIL1.1 | length 58.7
  Top Layer w0.2: FIL1.1 65.426,115.054 65.062,115.418 65.062,137.073 67.522,139.533 72.161,139.533 72.43,139.802 CONN1.7
  Bottom Layer w0.2: 68.174,117.518 67.778,117.914 67.778,130.766 68.481,131.47 68.481,137.671 72.644,141.834 72.644,141.91
NetCONN1_8: CONN1.8 FIL1.3 | length 108.9
  Top Layer w0.2: v1(60.681,111.404) 63.33,114.054 FIL1.3 ; v1(68.91,140.502) 69.096,140.688 CONN1.8
  Bottom Layer w0.2: v1(60.681,111.404) 53.645,111.404 52.984,112.065 52.984,143.053 53.984,144.052 77.614,144.052 77.622,144.043 76.894,143.315 71.723,143.315 v1(68.91,140.502) ; 60.833,118.161 60.833,132.436 v1@68.91,140.513
NetCONN2_4: CONN2.4 R10.2 U6.2 | length 15.7
  Top Layer w0.2: v1(81.204,140.106) 82.574,140.106 CONN2.4 ; U6.2 83.718,136.144 83.4,135.826 R10.2 83.4,133.045 v1(84.912,133.045)
  Bottom Layer w0.2: v1(81.204,140.106) 84.912,136.398 v1(84.912,133.045)
NetD2_1: R1.2 VCC.1@57.874,123.952 | length 2.2
  Top Layer w0.2: R1.2 56.769,123.952 VCC.1@57.874,123.952
NetD5_1: R9.1 VCC.1@57.874,121.666 | length 4.9
  Top Layer w0.2: R9.1 54.014,122.238 54.254,122.479 57.061,122.479 VCC.1@57.874,121.666
NetU1_26: U1.26 U9.6 | length 9.3
  Top Layer w0.2: U9.6 76.962,131.953 76.683,131.674 76.683,130.182 78.704,128.161 U1.26
NetU1_27: U1.27 U9.2 | length 39
  Top Layer w0.2: v1(69.799,128.803) 69.799,136.957 70.307,137.465 74.117,137.465 75.032,136.55 75.032,133.706 74.549,133.223 U9.2 ; v1(75.641,122.961) 75.91,122.692 77.503,122.692 78.204,123.393 U1.27
  Bottom Layer w0.2: v1(69.799,128.803) v1(75.641,122.961) ; 74.422,135.611 78.404,131.629 78.404,129.52
NetU1_28: U1.28 U9.5 | length 10.7
  Top Layer w0.2: U1.28 77.704,126.675 v1(77.846,126.675) ; U9.5 79.104,130.683 79.104,126.636 v1(79.883,125.857)
  Bottom Layer w0.2: v1(77.846,126.675) 78.664,125.857 v1(79.883,125.857)
NRST: CONN11.2 U1.7 | length 39.6
  Top Layer w0.2: v1(65.735,142.011) 65.735,141.91 66.286,141.359 CONN11.2 ; v1(76.302,121.463) 76.704,121.06 U1.7
  Bottom Layer w0.2: v1(65.735,142.011) 65.735,134.112 76.302,123.546 v1(76.302,121.463) ; 70.608,128.372 76.298,122.682
OSC_IN: C29.2 R15.2 U1.5 X1.3 | length 17
  Top Layer w0.2: R15.2 70.917,106.42 68.783,108.553 68.783,110.223 C29.2 70.796,112.236 X1.3 71.19,113.182 71.444,113.436 75.184,113.436 75.704,113.956 U1.5
OSC_OUT: C33.2 R15.1 U1.6 X1.1 | length 12.6
  Top Layer w0.2: R15.1 73.24,107.01 73.59,107.36 X1.1 73.59,109.436 C33.2 75.197,109.436 76.204,110.443 U1.6
S1_IN: FIL3.5 U1.42 | length 6.3
  Top Layer w0.2: FIL3.5 66.556,121.021 66.978,120.599 70.129,120.599 70.43,120.9 U1.42
S1_OUT: 1.1 U1.46 | length 54.1
  Top Layer w0.2: 1.1 67.027,111.604 67.027,117.141 69.088,119.202 70.968,119.202 71.27,118.9 U1.46
  Bottom Layer w0.2: 1.1 66.741,103.886 79.187,116.332 79.187,118.466 78.943,118.709 75.499,118.709 75.26,118.948
S2_IN: FIL3.4 U1.41 | length 4.9
  Top Layer w0.2: FIL3.4 67.735,121.4 U1.41
S2_OUT: 2.1 U1.45 | length 33.2
  Top Layer w0.2: U1.45 74.747,119.4 v1(74.752,119.405)
  Bottom Layer w0.2: 2.1 66.386,113.63 ; 73.939,119.812 73.533,119.405 ; v1(74.752,119.405) 73.533,119.405 ; 66.386,113.63 67.757,113.63 73.533,119.405 ; 66.386,113.63 72.161,119.405 73.533,119.405
S3_IN: FIL2.5 U1.18 | length 2.7
  Top Layer w0.2: U1.18 82.263,120.4 82.767,119.896 FIL2.5
S3_OUT: 3.1 U1.43 | length 55.7
  Top Layer w0.2: U1.43 73.562,120.4 v1(74.219,121.056)
  Bottom Layer w0.2: 3.1 58.064,107.975 58.064,105.664 58.496,105.232 60.681,105.232 ; v1(74.219,121.056) 74.6,120.675 ; v1@74.224,121.056 74.6,120.68 74.6,120.675 ; 60.681,105.232 61.265,105.232 62.509,106.477 62.509,107.061 ; 60.681,105.232 62.509,107.061 ; 62.509,107.061 67.369,111.921 67.369,112.979 67.609,113.219 68.667,113.219 74.117,118.669 ; 62.509,107.061 62.509,108.89 72.288,118.669 74.117,118.669 ; 74.117,118.669 75.006,118.669 75.413,119.075 75.413,119.863 74.6,120.675 ; 74.117,118.669 74.6,119.151 74.6,120.675
S4_IN: FIL2.4 U1.19 | length 2.5
  Top Layer w0.2: U1.19 81.737,120.9 81.741,120.896 FIL2.4
S4_OUT: 4.1 U1.29 | length 53.2
  Top Layer w0.2: v1(77.14,123.342) 77.204,123.407 U1.29
  Bottom Layer w0.2: 4.1 61.138,112.649 ; v1(77.14,123.342) 77.14,122.453 ; 77.343,127.406 77.343,122.657 77.14,122.453 ; 61.138,112.649 70.521,122.032 74.432,122.032 74.748,121.717 ; 61.138,112.649 64.783,112.649 66.192,114.059 67.526,114.059 70.307,116.84 70.307,120.498 71.526,121.717 74.748,121.717 ; 74.748,121.717 75.652,120.813 76.81,120.813 77.14,121.143 77.14,122.453 ; 74.748,121.717 76.403,121.717 77.14,122.453
S5_IN: FIL1.5 U1.10 | length 38.5
  Top Layer w0.2: FIL1.5 68.275,115.054 68.682,114.648 68.682,112.522 68.396,112.236 68.396,111.15 67.983,110.737 67.983,105.397 68.961,104.419 80.493,104.419 81.737,105.664 81.737,113.208 79.578,115.367 78.435,115.367 78.204,115.598 U1.10
S5_OUT: 5.1 U1.40 | length 28
  Top Layer w0.2: v1(69.85,122.377) 70.327,121.9 U1.40
  Bottom Layer w0.2: 62.509,125.73 62.509,118.516 5.1 62.789,115.316 v1(69.85,122.377)
S6_IN: FIL1.4 U1.11 | length 29.5
  Top Layer w0.2: FIL1.4 67.767,114.054 v1(67.767,112.471) ; v1(78.374,118.059) 78.704,117.729 U1.11
  Bottom Layer w0.2: v1(67.767,112.471) 67.767,112.37 68.072,112.065 71.465,112.065 71.872,112.471 ; v1@68.021,112.471 71.872,112.471 ; v1(78.374,118.059) 77.46,118.059 71.872,112.471 ; v1@78.537,118.059 72.949,112.471 71.872,112.471
S6_OUT: 6.1 U1.12 | length 57.2
  Top Layer w0.2: 6.1 58.141,117.983 58.141,116.23 58.064,116.154 58.064,102.311 58.522,101.854 81.28,101.854 82.144,102.718 82.144,114.021 80.162,116.002 79.204,116.002 U1.12
SCK: U1.15 U4.23 | length 29.4
  Top Layer w0.2: v1(78.283,120.498) 78.283,119.459 78.842,118.9 U1.15 ; v1(86.941,121.883) 87.388,121.435 U4.23
  Bottom Layer w0.2: v1(78.283,120.498) 77.851,120.929 ; v1(86.941,121.883) 85.623,120.565 82.061,120.565 ; 87.388,121.895 84.604,119.111 83.515,119.111 82.061,120.565 ; 77.851,120.929 77.673,121.107 77.673,121.92 77.851,122.098 ; 77.851,120.929 77.851,122.098 ; 77.851,122.098 77.851,122.123 78.156,122.428 78.181,122.428 ; 77.851,122.098 78.181,122.428 ; 78.181,122.428 80.137,122.428 ; 80.137,122.428 82,120.565 82.061,120.565 ; 80.137,122.428 80.198,122.428 82.061,120.565
SWDCLK: CONN11.4 U1.37 | length 26
  Top Layer w0.2: CONN11.4 v1(64.286,141.91) ; v1(67.818,133.858) 67.818,127.94 71.603,124.155 71.603,123.4 U1.37
  Bottom Layer w0.2: v1(64.286,141.91) 65.048,142.672 66.65,142.672 67.818,141.503 v1(67.818,133.858)
SWDIO: CONN11.3 U1.34 | length 28.1
  Top Layer w0.2: CONN11.3 65.286,141.173 65.075,141.173 65.075,142.646 65.43,143.002 v1(68.25,143.002) ; v1(71.892,135.56) 71.892,132.781 72.085,132.588 74.423,132.588 75.01,132.001 75.01,125.985 74.704,125.679 U1.34
  Bottom Layer w0.2: v1(68.25,143.002) 68.25,139.202 v1(71.892,135.56)
TO_REGS: C1.1 C2.1 C3.1 D1.3 U2.1 U2.3 U3.1 U3.3 | length 27.9
  Top Layer w0.2: U3.3 87.442,131.47 87.747,131.775 88.379,131.775 C1.1 89.192,131.849 89.342,131.699 U3.1 89.714,130.622 ; U2.3 96.332,124.638 95.698,124.638 89.714,130.622 ; U2.1 98.232,125.451 98.032,125.651 C3.1 98.032,127.356 97.982,127.406 C2.1 97.982,129.083 97.282,129.783 D1.3 89.714,130.622
UART1_RX: U1.31 U6.4 | length 24.3
  Top Layer w0.2: U1.31 76.204,125.878 75.87,126.213 75.87,136.22 77.648,137.998 84.176,137.998 84.811,137.363 84.811,136.205 85.522,135.494 U6.4
UART1_TX: CONN2.3 U1.30 | length 27.5
  Top Layer w0.2: U1.30 76.704,126.543 76.276,126.971 76.276,134.976 76.86,135.56 v1(78.562,135.56) ; v1(79.959,142.037) 83.371,142.037 83.574,141.834 CONN2.3
  Bottom Layer w0.2: 77.902,137.465 78.562,136.804 ; v1(78.562,135.56) 78.562,136.804 ; 79.731,135.636 78.562,136.804 ; v1(79.959,142.037) 78.562,140.64 78.562,136.804
UART3_RX: CONN3.4 R21.1 U1.22 | length 44.1
  Top Layer w0.2: v1(78.511,121.768) 79.144,122.4 U1.22 ; v1(90.805,135.23) 90.512,135.523 R21.1 91.034,137.668 91.464,138.098 CONN3.4
  Bottom Layer w0.2: v1@78.507,121.768 v1(78.511,121.768) ; v1(90.805,135.23) 90.805,123.8 85.725,118.72 ; v1(78.511,121.768) 81.559,118.72 83.1,118.72 ; v1(78.511,121.768) 80.052,121.768 83.1,118.72 ; 83.1,118.72 83.109,118.711 85.716,118.711 85.725,118.72 ; 83.1,118.72 85.725,118.72
UART3_TX: CONN3.3 R20.1 U1.21 | length 61.2
  Top Layer w0.2: v1(78.943,119.863) 79.197,120.117 79.197,121.875 79.223,121.9 U1.21 ; v1(91.465,136.627) 91.465,136.144 91.807,135.802 R20.1 93.472,135.802 93.675,136.005 93.675,138.159 92.464,139.37 CONN3.3
  Bottom Layer w0.2: 90.17,141.859 91.465,140.564 v1(91.465,136.627) 91.465,123.723 ; 81.741,118.313 80.493,118.313 v1(78.943,119.863) 80.192,119.863 81.741,118.313 ; 81.741,118.313 86.055,118.313 91.465,123.723 ; 81.741,118.313 81.743,118.311 86.282,118.311 91.465,123.495 91.465,123.723
USB_D_N: R11.1 U1.32
USB_D_P: R13.1 R14.2 U1.33 | length 3
  Top Layer w0.381: R13.1 102.108,129.78 102.196,129.692 R14.2
USB_PWR: CONN4.1 D1.1 R2.1 | length 18.1
  Top Layer w0.2: D1.1 98.232,132.969 99.035,132.969 99.771,133.706 99.771,138.201 100.381,138.811 103.765,138.811 103.962,138.614 CONN4.1 103.962,135.636 105.918,133.68 R2.1
USB_R_N: CONN4.2 R11.2 | length 4.5
  Top Layer w0.381: CONN4.2 103.162,135.395 103.886,134.671 R11.2
USB_R_P: CONN4.3 R13.2 | length 4.3
  Top Layer w0.381: R13.2 102.108,134.899 102.362,135.153 CONN4.3
VBUS_SEN: R2.2 R3.2 U1.3 | length 85.4
  Top Layer w0.2: U1.3 74.704,114.45 v1(74.981,114.173) ; R2.2 105.918,129.833 106.084,129.667 R3.2 v1(106.084,114.173)
  Bottom Layer w0.2: v1(74.981,114.173) v1(106.084,114.173) ; 75.921,120.802 77.614,119.109 80.145,119.109 81.449,117.805 87.347,117.805 87.588,118.046 97.853,118.046 106.084,126.277
VCC: C4.1 C5.1 C28.2 C30.2 C34.2 C35.1 C36.2 C38.1 C39.1 JP7.2 R14.1 R17.1 R20.2 R21.2 R22.2 U1.1 U1.9 U1.24 U1.36 U1.48 U2.5 U6.5 U9.3 U9.7 U9.8 VCC.2
VCC_ANA: C6.1 C7.1 L1.2 U3.5 | length 7.3
  Top Layer w0.2: U3.5 89.342,127.886 89.142,127.686 C6.1 89.142,126.136 89.192,126.086 C7.1 89.854,124.56 L1.2
VCC_UNREG: 1.2 2.2 3.2 4.2 5.2 6.2 CONN1.2 CONN2.2 CONN3.2 D1.2 | length 160.4
  Top Layer w0.2: 1.2 2.2 3.2 4.2 5.2 6.2 ; CONN1.2 77.43,139.802 77.974,139.258 84.03,139.258 84.574,139.802 CONN2.2 84.574,141.783 ; v1(80.239,143.078) 83.736,143.078 84.574,142.24 84.574,141.783 ; D1.2 96.332,136.676 93.464,139.544 CONN3.2 93.464,141.707 93.388,141.783 84.574,141.783
  Bottom Layer w0.2: 3.2 55.524,110.465 53.467,110.465 52.578,111.354 52.578,143.561 53.645,144.628 78.689,144.628 v1(80.239,143.078) ; 6.2 56.769,142.316 57.709,143.256 77.43,143.256
pads on no net: CONN1.0 CONN2.0 CONN3.0 CONN4.4 CONN4.6 CONN11.0 U1.2 U1.4 U1.38 U4.2 U4.3 U4.4 U4.5 U4.6 U4.7 U4.14 U4.15 U4.16 U4.17 U4.19 U4.21 U4.22

## Polygon pours and split planes (outlines as drawn)
VCC on Top Layer "Top Layer-VCC 1" (solid, pour order 4): 51.2,145.8 120.4,145.8 120.4,76.6 51.2,76.6
VCC on Top Layer "Top Layer-VCC" (solid, pour order 10): 50.8,76.2 120.8,76.2 120.8,146.2 50.8,146.2
GND on Bottom Layer "Bottom Layer-GND" (solid, pour order 12): 50.8,76.2 120.8,76.2 120.8,146.2 50.8,146.2

## Keep-outs
Keep-Out Layer:
  lines w0.254: 51.2,76.6 120.4,76.6 120.4,145.8 51.2,145.8 51.2,76.6

## Silkscreen, mask and mechanical layers (free items; w line width, h text height)
Drill Drawing:
  text ".LEGEND" at 117.967,84.709 h1.52
  text "Drill Drawing." at 117.967,82.169 h1.52

## Dimensions
51.2,76.6 to 120.4,76.6 on Mechanical 1
51.2,76.6 to 51.2,145.8 on Mechanical 1